# Altium PCB PCB_KB77_2021-07-05.pcbdoc
Units mm, origin at the board's own origin, x right, y up, seen from the top; angles counter-clockwise.
Board outline 311.4 x 140.15 mm, 2 copper layers (Top Layer, Bottom Layer); 81 components, 494 nets, 1036 pads, 127 vias.
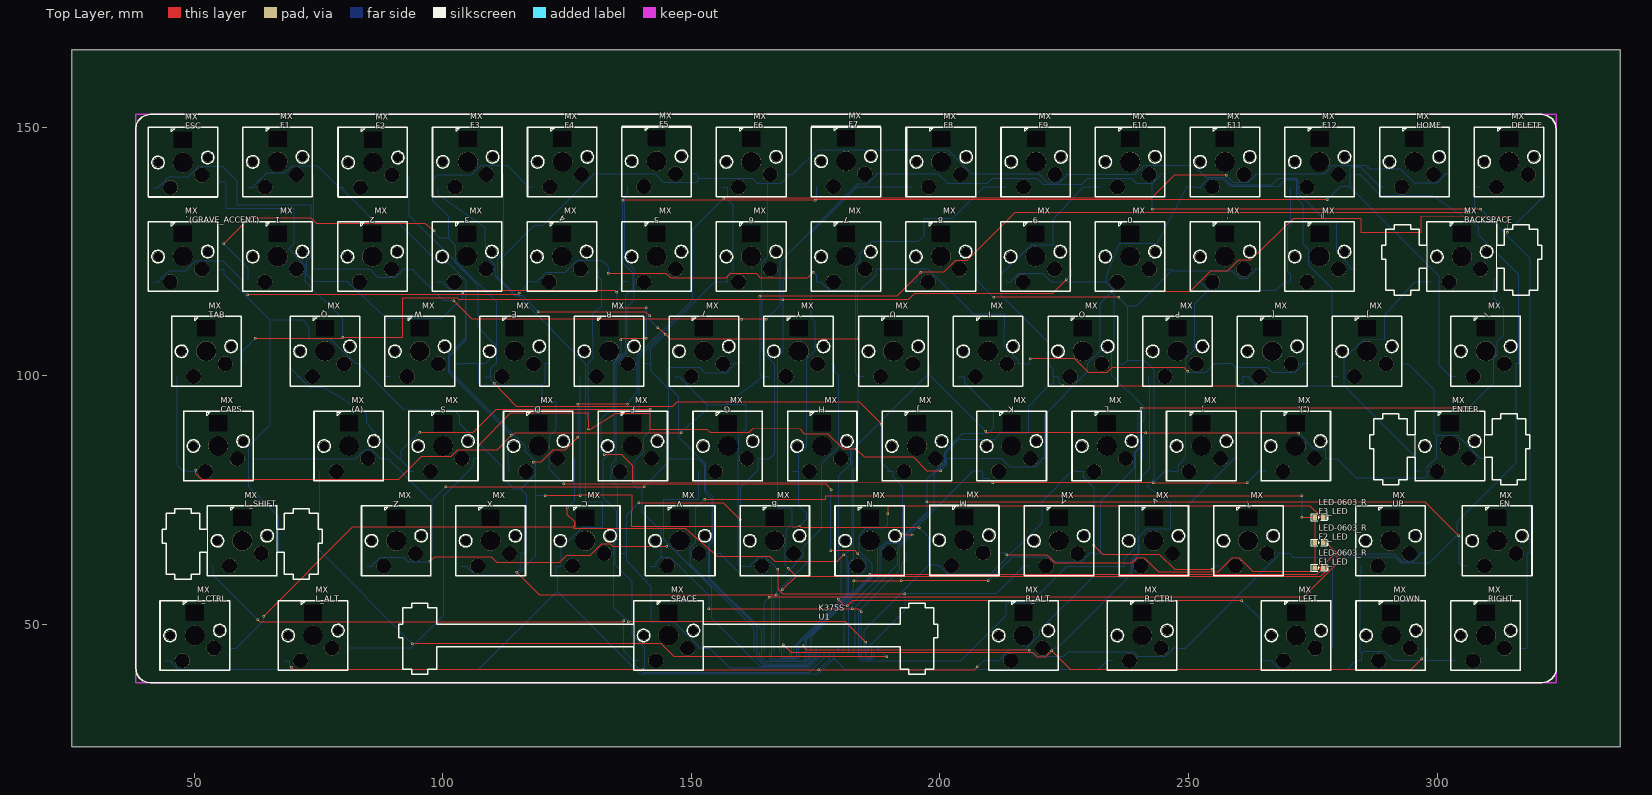
[diagram p0: Top Layer view]
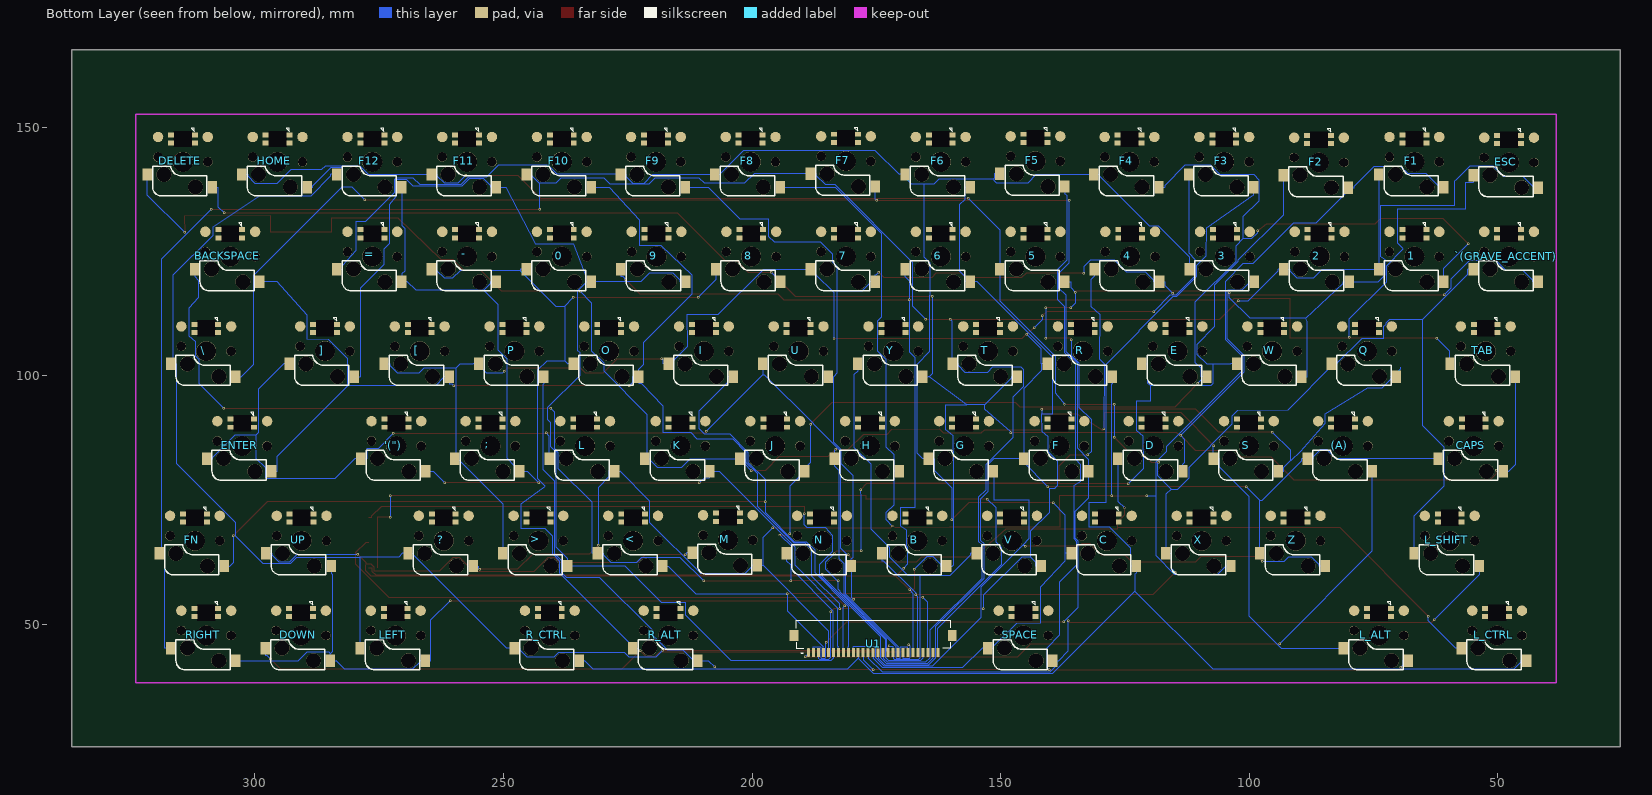
[diagram p1: Bottom Layer view, seen from below]

## Layer stack, top to bottom
Top Layer: signal copper (thickness not stored)
Dielectric: dielectric 0.32, FR-4, Dk 4.8
Bottom Layer: signal copper (thickness not stored)

## Board outline
336.805,25.4 25.4,25.4 25.4,165.545 336.805,165.545

## Components (designator, comment, footprint, x,y, rotation, side; value= is the part's Value field where it differs from the comment)
0 "MX" MX_CONTACT_POGOPIN_M1.4 238.252,123.953 r0 top
1 "MX" MX_CONTACT_POGOPIN_M1.4 66.802,123.953 r0 top
2 "MX" MX_CONTACT_POGOPIN_M1.4 85.852,123.953 r0 top
3 "MX" MX_CONTACT_POGOPIN_M1.4 104.902,123.953 r0 top
4 "MX" MX_CONTACT_POGOPIN_M1.4 123.952,123.953 r0 top
5 "MX" MX_CONTACT_POGOPIN_M1.4 143.002,123.953 r0 top
6 "MX" MX_CONTACT_POGOPIN_M1.4 162.052,123.953 r0 top
7 "MX" MX_CONTACT_POGOPIN_M1.4 181.102,123.953 r0 top
8 "MX" MX_CONTACT_POGOPIN_M1.4 200.152,123.953 r0 top
9 "MX" MX_CONTACT_POGOPIN_M1.4 219.202,123.953 r0 top
"'(\")" "MX" MX_CONTACT_POGOPIN_M1.4 271.526,85.853 r0 top
(A) "MX" MX_CONTACT_POGOPIN_M1.4 81.153,85.853 r0 top
- "MX" MX_CONTACT_POGOPIN_M1.4 257.302,123.953 r0 top
; "MX" MX_CONTACT_POGOPIN_M1.4 252.603,85.853 r0 top
< "MX" MX_CONTACT_POGOPIN_M1.4 223.901,66.803 r0 top
= "MX" MX_CONTACT_POGOPIN_M1.4 276.352,123.953 r0 top
> "MX" MX_CONTACT_POGOPIN_M1.4 242.951,66.803 r0 top
? "MX" MX_CONTACT_POGOPIN_M1.4 262.001,66.803 r0 top
[ "MX" MX_CONTACT_POGOPIN_M1.4 266.827,104.903 r0 top
\ "MX" MX_CONTACT_POGOPIN_M1.4 309.753,104.903 r0 top
] "MX" MX_CONTACT_POGOPIN_M1.4 285.877,104.903 r0 top
`(GRAVE_ACCENT) "MX" MX_CONTACT_POGOPIN_M1.4 47.752,123.953 r0 top
B "MX" MX_CONTACT_POGOPIN_M1.4 166.751,66.803 r0 top
BACKSPACE "MX" MX_CONTACT_POGOPIN_M1.4 304.927,123.953 r0 top
C "MX" MX_CONTACT_POGOPIN_M1.4 128.651,66.803 r0 top
CAPS "MX" MX_CONTACT_POGOPIN_M1.4 54.864,85.853 r0 top
D "MX" MX_CONTACT_POGOPIN_M1.4 119.253,85.853 r0 top
DELETE "MX" MX_CONTACT_POGOPIN_M1.4 314.452,143.003 r0 top
DOWN "MX" MX_CONTACT_POGOPIN_M1.4 290.703,47.753 r0 top
E "MX" MX_CONTACT_POGOPIN_M1.4 114.427,104.903 r0 top
ENTER "MX" MX_CONTACT_POGOPIN_M1.4 302.514,85.853 r0 top
ESC "MX" MX_CONTACT_POGOPIN_M1.4 47.752,142.876 r0 top
F "MX" MX_CONTACT_POGOPIN_M1.4 138.176,85.853 r0 top
F1 "MX" MX_CONTACT_POGOPIN_M1.4 66.802,143.003 r0 top
F1_LED "LED-0603_R" LED0603_RED 276.225,61.342 r0 top
F2 "MX" MX_CONTACT_POGOPIN_M1.4 85.979,142.876 r0 top
F2_LED "LED-0603_R" LED0603_RED 276.225,66.422 r0 top
F3 "MX" MX_CONTACT_POGOPIN_M1.4 105.029,143.003 r0 top
F3_LED "LED-0603_R" LED0603_RED 276.225,71.502 r0 top
F4 "MX" MX_CONTACT_POGOPIN_M1.4 124.079,143.003 r0 top
F5 "MX" MX_CONTACT_POGOPIN_M1.4 143.002,143.13 r0 top
F6 "MX" MX_CONTACT_POGOPIN_M1.4 162.052,143.003 r0 top
F7 "MX" MX_CONTACT_POGOPIN_M1.4 181.102,143.13 r0 top
F8 "MX" MX_CONTACT_POGOPIN_M1.4 200.279,143.003 r0 top
F9 "MX" MX_CONTACT_POGOPIN_M1.4 219.329,143.003 r0 top
F10 "MX" MX_CONTACT_POGOPIN_M1.4 238.252,143.003 r0 top
F11 "MX" MX_CONTACT_POGOPIN_M1.4 257.302,143.003 r0 top
F12 "MX" MX_CONTACT_POGOPIN_M1.4 276.352,143.003 r0 top
FN "MX" MX_CONTACT_POGOPIN_M1.4 312.039,66.803 r0 top
G "MX" MX_CONTACT_POGOPIN_M1.4 157.353,85.853 r0 top
H "MX" MX_CONTACT_POGOPIN_M1.4 176.276,85.853 r0 top
HOME "MX" MX_CONTACT_POGOPIN_M1.4 295.402,143.003 r0 top
I "MX" MX_CONTACT_POGOPIN_M1.4 209.677,104.903 r0 top
J "MX" MX_CONTACT_POGOPIN_M1.4 195.326,85.853 r0 top
K "MX" MX_CONTACT_POGOPIN_M1.4 214.376,85.853 r0 top
L "MX" MX_CONTACT_POGOPIN_M1.4 233.553,85.853 r0 top
L_ALT "MX" MX_CONTACT_POGOPIN_M1.4 73.914,47.753 r0 top
L_CTRL "MX" MX_CONTACT_POGOPIN_M1.4 50.165,47.753 r0 top
L_SHIFT "MX" MX_CONTACT_POGOPIN_M1.4 59.69,66.803 r0 top
LEFT "MX" MX_CONTACT_POGOPIN_M1.4 271.653,47.753 r0 top
M "MX" MX_CONTACT_POGOPIN_M1.4 204.851,66.93 r0 top
N "MX" MX_CONTACT_POGOPIN_M1.4 185.928,66.803 r0 top
O "MX" MX_CONTACT_POGOPIN_M1.4 228.727,104.903 r0 top
P "MX" MX_CONTACT_POGOPIN_M1.4 247.777,104.903 r0 top
Q "MX" MX_CONTACT_POGOPIN_M1.4 76.327,104.903 r0 top
R "MX" MX_CONTACT_POGOPIN_M1.4 133.477,104.903 r0 top
R_ALT "MX" MX_CONTACT_POGOPIN_M1.4 216.789,47.753 r0 top
R_CTRL "MX" MX_CONTACT_POGOPIN_M1.4 240.665,47.753 r0 top
RIGHT "MX" MX_CONTACT_POGOPIN_M1.4 309.753,47.753 r0 top
S "MX" MX_CONTACT_POGOPIN_M1.4 100.076,85.853 r0 top
SPACE "MX" MX_CONTACT_POGOPIN_M1.4 145.415,47.753 r0 top
T "MX" MX_CONTACT_POGOPIN_M1.4 152.527,104.903 r0 top
TAB "MX" MX_CONTACT_POGOPIN_M1.4 52.451,104.903 r0 top
U "MX" MX_CONTACT_POGOPIN_M1.4 190.627,104.903 r0 top
U1 "K375S" "K375S  27P" 175.641,48.896 r0 top
UP "MX" MX_CONTACT_POGOPIN_M1.4 290.576,66.803 r0 top
V "MX" MX_CONTACT_POGOPIN_M1.4 147.701,66.803 r0 top
W "MX" MX_CONTACT_POGOPIN_M1.4 95.377,104.903 r0 top
X "MX" MX_CONTACT_POGOPIN_M1.4 109.601,66.803 r0 top
Y "MX" MX_CONTACT_POGOPIN_M1.4 171.577,104.903 r0 top
Z "MX" MX_CONTACT_POGOPIN_M1.4 90.678,66.803 r0 top

## Footprints (in the part's own frame and the unit in brackets; to place one, negate y for a bottom-side part, rotate by r counter-clockwise, add the part's x,y. Pads: shape width x height; smd on the part's side, far side on the other; paste and mask are expansions set on the pad)
"K375S  27P" [mm]
  oval 0.6x1.88 smd far side: 1(13,-4.55)
  rect 0.6x1.88 smd far side: 2(12,-4.55) 3(11,-4.55) 4(10,-4.55) 5(9,-4.55) 6(8,-4.55) 7(7,-4.55) 8(6,-4.55) 9(5,-4.55) 10(4,-4.55) 11(3,-4.55) 12(2,-4.55) 13(1,-4.55) 14(0,-4.55) 15(-1,-4.55) 16(-2,-4.55) 17(-3,-4.55) 18(-4,-4.55) 19(-5,-4.55) 20(-6,-4.55) 21(-7,-4.55) 22(-8,-4.55) 23(-9,-4.55) 24(-10,-4.55) 25(-11,-4.55) 26(-12,-4.55) 27(-13,-4.55)
  rect 1.8x2.2 smd far side: 98(15.908,-1.11) 99(-15.908,-1.11)
LED0603_RED [mm]
  rect 0.9x1 smd: 1(-0.85,0) 2(0.85,0)
  silkscreen extent -1.54,-0.73 1.75,0.73
MX_CONTACT_POGOPIN_M1.4 [mm]
  rect 1.9x2.5 smd far side: K1(-5.918,-5.08) K2(7.188,-2.54)
  rect 1.2x1 smd far side: L1(-2.4,5.425) L2(-2.4,3.775) L3(2.4,3.775) L4(2.4,5.425)
  round 2.1 smd far side: P1(-5,5) P2(5,5)
  round 1.9 hole 1.9 unplated: ""(-5,0) ""(5,1)
  round 3 hole 3 unplated: ""(-2.54,-5.08) ""(3.81,-2.54)
  round 4 hole 4 unplated: ""(0,0)
  Multi-Layer board cut-out: -1.8,6.2 1.8,6.2 1.8,3 -1.8,3
  silkscreen extent -7,-7 7,7

## Via types
v1: diameter 0.5, hole 0.3, Top Layer to Bottom Layer, 127 vias

## Nets (pads, with @x,y where several pads share a name; then routed paths per layer and width w, separated by ;. In a path a pad name is that pad's centre, name@x,y a point inside that pad or via, vN(x,y) a via of type N, cw(c..) or ccw(c..) an arc to the next point about the centre after c; other vN are vias at no path point)
0_K2: 0.K2 8.K2 -.K2 DOWN.K2 O.K2 R_ALT.K2 U1.20 | length 300.1
  Top Layer w0.15: v1(168.529,45.923) 170.083,44.369 218.654,44.369 219.574,43.449 221.238,43.449 v1(222.486,44.696) 226.197,40.985 294.77,40.985 v1(296.906,43.12) ; v1(210.857,115.74) v1(235.934,115.74)
  Bottom Layer w0.15: v1(168.529,45.923) 168.154,45.548 168.154,43.328 168.264,43.219 169.641,43.219 U1.20 ; 8.K2 207.341,119.256 v1(210.857,115.74) ; v1(222.486,44.696) 222.84,45.051 222.84,45.213 223.607,45.213 R_ALT.K2 ; R_ALT.K2@223.607,45.213 238.618,60.222 238.618,62.68 240.099,64.161 240.099,67.75 241.549,69.201 246.38,69.216 246.38,74.296 241.549,77.755 243.05,79.256 243.05,101.167 241.219,102.998 237.689,102.998 ; O.K2 237.053,102.363 237.688,102.998 237.688,113.986 ; v1(235.934,115.74) 237.688,113.986 ; 0.K2 246.578,121.413 246.578,121.127 ; -.K2 263.353,121.413 263.353,121.129 261.785,119.56 260.271,119.56 258.705,121.127 246.578,121.127 ; v1(296.906,43.12) 297.561,43.776 297.892,43.776 DOWN.K2 ; 237.688,113.986 239.437,113.986 246.578,121.127
0_L1: 0.L1
0_L2: 0.L2
0_L3: 0.L3
0_L4: 0.L4
0_P1: 0.P1
0_P2: 0.P2
1_L1: 1.L1
1_L2: 1.L2
1_L3: 1.L3
1_L4: 1.L4
1_P1: 1.P1
1_P2: 1.P2
2_L1: 2.L1
2_L2: 2.L2
2_L3: 2.L3
2_L4: 2.L4
2_P1: 2.P1
2_P2: 2.P2
3_L1: 3.L1
3_L2: 3.L2
3_L3: 3.L3
3_L4: 3.L4
3_P1: 3.P1
3_P2: 3.P2
4_L1: 4.L1
4_L2: 4.L2
4_L3: 4.L3
4_L4: 4.L4
4_P1: 4.P1
4_P2: 4.P2
5_L1: 5.L1
5_L2: 5.L2
5_L3: 5.L3
5_L4: 5.L4
5_P1: 5.P1
5_P2: 5.P2
6_K2: 6.K2 9.K2 ESC.K2 M.K2 TAB.K2 U1.22 UP.K2 | length 520.9
  Top Layer w0.15: v1(62.279,107.52) 79.707,107.52 v1(79.883,107.697) ; v1@79.883,107.598 91.821,107.605 91.821,107.824 91.821,108.002 91.821,115.571 102.997,115.571 103.282,115.286 v1@168.39,115.286 ; v1(168.303,56.908) 171.11,59.714 ; v1(168.39,115.287) 193.621,115.287 194.834,116.501 222.539,116.501 v1(225.362,119.323) ; v1(169.53,61.294) 171.11,59.714 ; v1(213.434,63.952) 221.519,63.952 223.067,62.404 238.706,62.404 239.713,63.41 241.111,63.41 243.928,60.593 255.945,60.593 258.763,63.41 260.161,63.41 262.92,60.651 275.978,60.651 276.022,60.695 276.022,61.503 276.548,62.029 277.603,62.029 ; v1(279.322,64.109) 277.603,62.39 277.603,62.029 ; 171.11,59.714 171.16,59.665 276.613,59.665 277.713,60.764 277.713,61.92 277.603,62.029
  Bottom Layer w0.15: ESC.K2 54.941,138.899 56.449,138.898 56.515,133.605 70.104,133.605 70.104,126.62 69.088,125.477 72.406,122.109 72.406,118.883 79.883,111.405 v1(79.883,107.697) ; TAB.K2 59.64,104.881 v1(62.279,107.52) ; U1.22 167.641,56.246 v1(168.303,56.908) ; v1@168.39,115.286 168.39,104.806 167.265,103.681 167.265,73.45 170.18,73.407 170.18,69.851 168.961,68.985 168.961,65.774 168.791,65.604 168.791,62.033 v1@169.53,61.294 ; v1(168.39,115.287) 168.39,119.125 169.241,119.976 6.K2 ; M.K2 213.177,64.39 213.177,64.209 v1(213.434,63.952) ; v1(225.362,119.323) 226.014,119.976 226.391,119.976 9.K2 ; v1(279.322,64.109) 291.419,64.109 292.961,62.566 295.214,62.566 296.627,63.979 296.627,64.263 UP.K2
6_L1: 6.L1
6_L2: 6.L2
6_L3: 6.L3
6_L4: 6.L4
6_P1: 6.P1
6_P2: 6.P2
7_L1: 7.L1
7_L2: 7.L2
7_L3: 7.L3
7_L4: 7.L4
7_P1: 7.P1
7_P2: 7.P2
8_L1: 8.L1
8_L2: 8.L2
8_L3: 8.L3
8_L4: 8.L4
8_P1: 8.P1
8_P2: 8.P2
9_L1: 9.L1
9_L2: 9.L2
9_L3: 9.L3
9_L4: 9.L4
9_P1: 9.P1
9_P2: 9.P2
"'(\")_L1": "'(\").L1"
"'(\")_L2": "'(\").L2"
"'(\")_L3": "'(\").L3"
"'(\")_L4": "'(\").L4"
"'(\")_P1": "'(\").P1"
"'(\")_P2": "'(\").P2"
(A)_K1: (A).K1 U1.1 | length 140
  Top Layer w0.15: v1(93.865,46.132) 143.943,46.132 146.574,43.5 v1(189.304,43.5)
  Bottom Layer w0.15: 75.235,80.773 75.235,64.761 v1(93.865,46.132) ; U1.1 188.641,44.163 v1(189.304,43.5)
(A)_L1: (A).L1
(A)_L2: (A).L2
(A)_L3: (A).L3
(A)_L4: (A).L4
(A)_P1: (A).P1
(A)_P2: (A).P2
-_L1: -.L1
-_L2: -.L2
-_L3: -.L3
-_L4: -.L4
-_P1: -.P1
-_P2: -.P2
;_L1: ;.L1
;_L2: ;.L2
;_L3: ;.L3
;_L4: ;.L4
;_P1: ;.P1
;_P2: ;.P2
<_L1: <.L1
<_L2: <.L2
<_L3: <.L3
<_L4: <.L4
<_P1: <.P1
<_P2: <.P2
=_K1: 2.K1 5.K1 "'(\").K1" -.K1 ;.K1 =.K1 ESC.K1 F12.K1 K.K1 U1.7 W.K1 | length 459.9
  Top Layer w0.15: v1(104.04,116.711) 104.392,117.063 134.789,117.063 v1(135.025,116.827) ; v1(132.461,84.075) 136.017,84.075 138.176,81.916 138.176,78.614 210.528,78.512 v1(210.572,78.456) ; v1(135.817,107.199) 135.817,107.369 136.017,107.57 v1(140.97,107.57) ; v1(135.89,113.666) v1(140.97,113.666) ; v1(210.572,78.456) v1(242.867,78.456) v1(261.768,78.456)
  Bottom Layer w0.15: ESC.K1 42.688,137.796 44.885,139.993 48.801,139.993 50.938,142.129 55.708,142.129 58.611,139.226 ; 58.674,139.193 58.674,134.24 73.533,134.24 73.533,123.953 72.644,123.318 72.67,122.218 72.67,120.255 74.052,118.873 81.071,118.873 81.071,118.589 88.646,111.507 ; W.K1 88.322,99.823 88.322,110.976 88.646,111.507 ; v1(104.04,116.711) 104.013,115.698 99.822,111.507 88.646,111.507 ; v1(132.461,84.075) 131.832,84.705 131.832,91.271 134.255,93.694 134.255,102.586 135.817,104.148 v1(135.817,107.199) ; v1(135.89,113.666) 135.025,114.532 v1(135.025,116.827) 135.947,117.75 135.947,118.873 5.K1 ; v1(140.97,107.57) v1(140.97,113.666) ; U1.7 182.641,45.473 182.822,45.654 182.822,53.366 191.454,61.998 191.454,65.606 206.622,80.773 K.K1 208.458,79.579 208.661,79.376 209.652,79.376 v1(210.572,78.456) ; v1(242.867,78.456) 245.185,80.773 245.548,80.773 246.685,80.773 247.822,80.773 247.822,81.91 249.371,83.459 249.371,103.403 251.159,105.191 251.159,114.34 253.965,117.145 252.521,118.589 252.521,118.873 -.K1 ; 253.965,117.146 267.569,117.146 269.296,118.873 =.K1 270.434,120.473 269.875,121.032 269.875,129.668 270.434,130.227 F12.K1 ; v1(261.768,78.456) 264.085,80.773 265.608,80.773
=_L1: =.L1
=_L2: =.L2
=_L3: =.L3
=_L4: =.L4
=_P1: =.P1
=_P2: =.P2
>_L1: >.L1
>_L2: >.L2
>_L3: >.L3
>_L4: >.L4
>_P1: >.P1
>_P2: >.P2
?_L1: ?.L1
?_L2: ?.L2
?_L3: ?.L3
?_L4: ?.L4
?_P1: ?.P1
?_P2: ?.P2
[_L1: [.L1
[_L2: [.L2
[_L3: [.L3
[_L4: [.L4
[_P1: [.P1
[_P2: [.P2
\_L1: \.L1
\_L2: \.L2
\_L3: \.L3
\_L4: \.L4
\_P1: \.P1
\_P2: \.P2
]_L1: ].L1
]_L2: ].L2
]_L3: ].L3
]_L4: ].L4
]_P1: ].P1
]_P2: ].P2
`(GRAVE_ACCENT)_K1: 4.K1 7.K1 `(GRAVE_ACCENT).K1 DOWN.K1 F9.K1 LEFT.K1 N.K1 RIGHT.K1 U1.8 U.K1 UP.K1 | length 433
  Top Layer w0.15: v1(60.822,116.25) 115.021,116.25 v1(115.397,116.626) ; v1(133.312,120.64) 144.836,120.64 145.818,119.658 157.052,119.658 157.962,120.568 163.038,120.568 163.88,119.726 173.386,119.726 v1(174.498,120.838) ; v1(179.584,55.054) 180.878,53.76 181.36,53.76 v1(181.36,53.735) ; v1@181.359,53.76 182.337,54.738 v1(260.731,54.738)
  Bottom Layer w0.15: 41.834,118.873 42.971,118.873 42.971,119.157 44.885,121.07 48.316,121.07 50.371,123.125 55.797,123.125 59.48,119.443 59.48,117.592 v1(60.822,116.25) ; v1(115.397,116.626) 116.897,118.126 116.897,118.873 4.K1 119.171,118.873 119.171,119.157 120.791,120.777 124.692,120.777 127.079,123.165 132.009,123.165 133.312,121.862 v1(133.312,120.64) ; v1(174.498,120.838) 175.026,120.31 175.184,120.31 7.K1 176.321,118.873 176.321,118.616 177.847,117.09 182.949,117.09 ; v1(179.584,55.054) 180.01,55.48 N.K1 180.01,62.441 180.01,63.16 179.636,63.535 179.636,79.856 182.022,82.242 182.022,85.113 183.572,86.663 183.572,99.823 ; v1(181.36,53.735) 181.641,53.453 U1.8 ; U.K1 183.572,99.823 ; F9.K1 208.847,137.923 202.449,131.525 196.723,131.525 196.723,128.085 195.558,126.92 186.289,126.92 183.907,124.537 183.907,122.947 182.949,121.989 182.949,117.09 ; v1(260.731,54.738) 264.598,50.871 264.598,42.673 LEFT.K1 266.304,42.673 266.872,42.673 266.872,42.389 268.329,40.932 281.907,40.932 283.648,42.673 DOWN.K1 284.785,44.11 ; UP.K1 284.658,60.286 284.393,60.021 284.393,44.502 284.785,44.11 ; RIGHT.K1 291.255,42.673 289.492,44.436 285.111,44.436 284.785,44.11 ; 182.949,117.09 182.949,100.446 183.572,99.823
`(GRAVE_ACCENT)_L1: `(GRAVE_ACCENT).L1
`(GRAVE_ACCENT)_L2: `(GRAVE_ACCENT).L2
`(GRAVE_ACCENT)_L3: `(GRAVE_ACCENT).L3
`(GRAVE_ACCENT)_L4: `(GRAVE_ACCENT).L4
`(GRAVE_ACCENT)_P1: `(GRAVE_ACCENT).P1
`(GRAVE_ACCENT)_P2: `(GRAVE_ACCENT).P2
B_K1: 3.K1 8.K1 <.K1 B.K1 CAPS.K1 D.K1 DELETE.K1 T.K1 TAB.K1 U1.4 Y.K1 | length 501.2
  Top Layer w0.15: v1(50.36,80.955) 50.36,80.241 51.551,79.05 91.056,79.05 95.663,83.658 101.573,83.658 102.916,85.001 110.847,85.001 v1(113.819,87.973) 114.008,87.973 114.554,88.52 v1(147.955,88.52) ; v1(163.784,115.95) 191.311,115.95 v1(196.136,120.775) 200.715,120.775 203.041,123.101 205.397,123.101 215.088,132.792 v1(306.18,132.792) ; v1(167.384,61.077) 167.384,57.131 168.333,56.183 v1(192.904,56.183)
  Bottom Layer w0.15: TAB.K1 46.533,82.049 47.809,80.773 CAPS.K1 50.083,80.773 50.266,80.955 v1(50.36,80.955) ; 3.K1 100.121,118.873 100.121,118.589 101.543,117.167 104.343,117.167 104.496,117.014 104.496,107.518 101.135,104.158 101.135,100.657 v1(113.819,87.973) 113.044,87.198 113.044,82.501 113.335,82.21 D.K1 ; T.K1 147.746,99.823 147.746,99.539 153.162,94.108 ; v1(147.955,88.52) 147.955,88.75 153.162,93.219 153.162,94.108 ; v1(163.784,115.95) 163.784,100.413 164.374,99.823 ; Y.K1 164.522,99.823 164.374,99.823 ; v1(167.384,61.077) 164.887,63.574 163.537,63.574 161.97,62.007 161.97,61.723 B.K1 160.265,61.723 159.696,61.723 159.391,62.028 159.391,84.797 159.558,84.964 159.558,87.871 161.036,89.155 161.036,94.108 156.845,94.108 ; U1.4 185.641,45.473 192.904,52.735 v1(192.904,56.183) 211.306,56.183 216.846,61.723 <.K1 ; 8.K1 195.371,118.873 195.371,120.01 v1(196.136,120.775) ; v1(306.18,132.792) 307.396,134.01 307.396,137.923 DELETE.K1 ; 153.162,94.108 156.845,94.108 ; 156.845,94.108 164.374,99.823
B_L1: B.L1
B_L2: B.L2
B_L3: B.L3
B_L4: B.L4
B_P1: B.P1
B_P2: B.P2
BACKSPACE_L1: BACKSPACE.L1
BACKSPACE_L2: BACKSPACE.L2
BACKSPACE_L3: BACKSPACE.L3
BACKSPACE_L4: BACKSPACE.L4
BACKSPACE_P1: BACKSPACE.P1
BACKSPACE_P2: BACKSPACE.P2
C_L1: C.L1
C_L2: C.L2
C_L3: C.L3
C_L4: C.L4
C_P1: C.P1
C_P2: C.P2
CAPS_L1: CAPS.L1
CAPS_L2: CAPS.L2
CAPS_L3: CAPS.L3
CAPS_L4: CAPS.L4
CAPS_P1: CAPS.P1
CAPS_P2: CAPS.P2
D_L1: D.L1
D_L2: D.L2
D_L3: D.L3
D_L4: D.L4
D_P1: D.P1
D_P2: D.P2
DELETE_L1: DELETE.L1
DELETE_L2: DELETE.L2
DELETE_L3: DELETE.L3
DELETE_L4: DELETE.L4
DELETE_P1: DELETE.P1
DELETE_P2: DELETE.P2
DOWN_L1: DOWN.L1
DOWN_L2: DOWN.L2
DOWN_L3: DOWN.L3
DOWN_L4: DOWN.L4
DOWN_P1: DOWN.P1
DOWN_P2: DOWN.P2
E_L1: E.L1
E_L2: E.L2
E_L3: E.L3
E_L4: E.L4
E_P1: E.P1
E_P2: E.P2
ENTER_L1: ENTER.L1
ENTER_L2: ENTER.L2
ENTER_L3: ENTER.L3
ENTER_L4: ENTER.L4
ENTER_P1: ENTER.P1
ENTER_P2: ENTER.P2
ESC_L1: ESC.L1
ESC_L2: ESC.L2
ESC_L3: ESC.L3
ESC_L4: ESC.L4
ESC_P1: ESC.P1
ESC_P2: ESC.P2
F1_K2: 1.K2 2.K2 F1.K2 F7.K2 F10.K2 FN.K2 RIGHT.K2 T.K2 U1.16 | length 485.8
  Top Layer w0.15: v1(102.208,115.077) 105.955,111.33 v1(160.095,111.33) v1(165.062,111.33) ; v1(242.646,133.463) v1(308.768,133.463)
  Bottom Layer w0.15: F1.K2 1.K2 85.299,121.413 87.018,119.694 90.469,119.694 91.903,121.129 91.903,121.413 2.K2 94.178,121.413 94.178,121.129 100.23,115.077 v1(102.208,115.077) ; v1(160.095,111.33) 159.716,110.951 T.K2 158.578,102.363 158.578,102.079 157.103,100.603 152.746,100.603 151.675,101.674 145.902,101.674 145.395,101.168 145.395,97.866 147.483,95.779 147.483,87.598 152.931,82.15 152.931,77.072 154.358,75.646 154.358,66.624 153.738,66.005 153.738,59.273 164.154,48.857 164.154,43.32 165.045,42.429 172.851,42.429 173.641,43.219 U1.16 ; v1(165.062,111.33) 167.768,114.035 167.768,122.836 183.383,138.451 185.299,138.451 187.153,140.306 187.153,140.59 F7.K2 189.428,140.59 199.599,140.59 201.515,138.674 209.546,138.674 210.568,139.696 219.543,139.696 220.755,138.483 228.544,138.483 229.757,139.696 238.466,139.696 239.46,138.702 242.646,138.702 ; v1(242.646,133.463) 242.646,138.702 ; F10.K2 244.303,140.463 244.303,140.179 242.827,138.702 242.646,138.702 ; v1(308.768,133.463) 318.687,123.543 FN.K2@318.687,64.263 ; RIGHT.K2 318.08,45.213 318.08,64.243 318.1,64.263 FN.K2@318.687,64.263 ; FN.K2 FN.K2@318.687,64.263
F1_L1: F1.L1
F1_L2: F1.L2
F1_L3: F1.L3
F1_L4: F1.L4
F1_P1: F1.P1
F1_P2: F1.P2
F2_L1: F2.L1
F2_L2: F2.L2
F2_L3: F2.L3
F2_L4: F2.L4
F2_P1: F2.P1
F2_P2: F2.P2
F3_L1: F3.L1
F3_L2: F3.L2
F3_L3: F3.L3
F3_L4: F3.L4
F3_P1: F3.P1
F3_P2: F3.P2
F4_K2: 3.K2 =.K2 C.K2 F4.K2 F5.K2 F6.K2 F8.K2 F9.K2 G.K2 SPACE.K2 U1.14 | length 371
  Top Layer w0.15: v1(139.446,74.423) 156.419,74.423 v1(159.852,70.989)
  Bottom Layer w0.15: 3.K2 112.091,123.956 118.336,130.202 120.153,130.202 130.13,140.179 130.13,140.463 F4.K2 142.831,140.463 144.492,138.801 150.871,138.801 151.365,139.295 151.365,139.619 ; C.K2 136.977,64.263 ; v1(139.446,74.423) 136.977,71.953 136.977,64.263 ; F5.K2 151.328,140.59 151.328,139.657 151.365,139.619 ; 151.466,45.213 151.466,45.553 146.772,50.25 141.986,50.293 141.986,57.532 136.978,62.79 136.978,64.263 ; 151.466,45.213 152.035,45.213 SPACE.K2 153.741,45.213 157.675,41.279 173.702,41.279 175.641,43.219 U1.14 ; v1(159.852,70.989) 159.852,77.431 163.404,80.983 163.404,83.313 G.K2 165.679,83.313 166.804,84.438 166.804,102.336 164.221,104.919 164.221,116.131 164.157,116.195 164.157,122.611 165.345,123.799 165.345,138.609 ; F6.K2 F6.K2@169.809,140.463 ; 282.403,121.413 282.403,122.127 279.654,125.096 279.654,130.938 277.749,130.938 271.905,136.785 271.905,139.437 271.592,139.749 268.125,139.749 266.754,138.375 258.57,138.375 257.02,139.927 253.439,139.927 251.082,142.284 240.978,142.284 239.159,140.463 F9.K2 225.949,140.463 225.38,140.463 225.38,140.107 224.02,138.746 221.715,138.746 219.998,140.463 F8.K2 206.33,140.463 206.33,140.752 201.701,145.382 175.297,145.382 170.378,140.463 F6.K2@169.809,140.463 ; 282.403,121.413 =.K2 ; 151.365,139.619 162.343,139.619 163.352,138.609 165.345,138.609 ; 165.345,138.609 167.956,138.609 F6.K2@169.809,140.463
F4_L1: F4.L1
F4_L2: F4.L2
F4_L3: F4.L3
F4_L4: F4.L4
F4_P1: F4.P1
F4_P2: F4.P2
F5_L1: F5.L1
F5_L2: F5.L2
F5_L3: F5.L3
F5_L4: F5.L4
F5_P1: F5.P1
F5_P2: F5.P2
F6_L1: F6.L1
F6_L2: F6.L2
F6_L3: F6.L3
F6_L4: F6.L4
F6_P1: F6.P1
F6_P2: F6.P2
F7_L1: F7.L1
F7_L2: F7.L2
F7_L3: F7.L3
F7_L4: F7.L4
F7_P1: F7.P1
F7_P2: F7.P2
F8_L1: F8.L1
F8_L2: F8.L2
F8_L3: F8.L3
F8_L4: F8.L4
F8_P1: F8.P1
F8_P2: F8.P2
F9_L1: F9.L1
F9_L2: F9.L2
F9_L3: F9.L3
F9_L4: F9.L4
F9_P1: F9.P1
F9_P2: F9.P2
F10_L1: F10.L1
F10_L2: F10.L2
F10_L3: F10.L3
F10_L4: F10.L4
F10_P1: F10.P1
F10_P2: F10.P2
F11_K1: 0.K1 1.K1 9.K1 >.K1 ].K1 E.K1 F4.K1 F11.K1 J.K1 U1.6 | length 512.1
  Top Layer w0.15: v1(56.007,126.493) 61.087,131.7 73.533,131.7 74.676,130.557 96.52,130.557 v1@98.339,129.107 ; v1(110.351,98.483) 114.935,93.727 130.937,93.727 146.177,93.727 147.066,94.616 183.896,94.616 188.172,90.34 v1(188.172,90.274) ; v1(192.454,68.227) 192.721,67.96 v1(194.454,67.96)
  Bottom Layer w0.15: v1(56.007,126.493) 60.884,121.616 1.K1 ; v1(98.338,129.108) 98.338,128.767 99.513,127.592 101.166,127.592 ; E.K1 109.646,99.823 ; v1(110.351,98.483) 109.646,99.188 109.646,99.823 ; F4.K1 117.024,137.923 117.024,138.207 112.948,142.283 107.756,142.283 105.881,140.408 99.043,140.408 97.974,139.338 97.974,135.213 101.166,132.021 101.166,127.592 ; 183.641,43.219 183.641,43.782 U1.6 183.641,52.671 191.911,60.941 191.911,65.582 194.29,67.96 v1(194.454,67.96) ; 183.642,43.219 184.168,42.693 204.168,42.693 213.36,51.817 213.36,54.357 218.186,54.357 225.484,61.723 >.K1 237.033,63.16 239.374,65.501 239.374,84.595 240.478,85.7 240.478,90.547 241.046,91.114 241.046,93.655 234.595,100.106 234.595,104.582 235.065,105.052 235.065,117.044 233.236,118.873 0.K1@233.047,118.873 ; v1(188.172,90.274) 188.172,82.578 J.K1@189.977,80.773 ; J.K1 J.K1@189.977,80.773 ; v1(192.454,68.227) 192.454,77.727 190.545,79.636 190.545,80.773 J.K1@189.977,80.773 ; 9.K1 214.421,118.873 214.421,119.157 215.829,120.565 220.659,120.565 222.351,118.873 0.K1 232.478,118.873 0.K1@233.047,118.873 ; ].K1 278.822,99.823 278.822,117.553 274.047,122.329 274.047,125.447 272.923,126.493 272.923,134.367 271.608,135.943 271.608,139.353 271.564,139.397 269.428,139.397 268.144,138.113 258.35,138.113 256.844,139.619 253.934,139.619 252.521,138.207 252.521,137.923 F11.K1 249.555,137.923 243.586,126.493 235.966,126.493 233.471,120.01 233.471,118.873 0.K1@233.047,118.873 ; 101.166,127.592 102.643,126.115 102.643,123.007 110.828,114.822 110.828,102.647 109.646,101.465 109.646,99.823
F11_L1: F11.L1
F11_L2: F11.L2
F11_L3: F11.L3
F11_L4: F11.L4
F11_P1: F11.P1
F11_P2: F11.P2
F12_L1: F12.L1
F12_L2: F12.L2
F12_L3: F12.L3
F12_L4: F12.L4
F12_P1: F12.P1
F12_P2: F12.P2
F_L1: F.L1
F_L2: F.L2
F_L3: F.L3
F_L4: F.L4
F_P1: F.P1
F_P2: F.P2
FN_K1: FN.K1 I.K1 U1.9 | length 193.2
  Top Layer w0.15: v1(197.358,74.677) 297.448,74.677 v1(304.343,67.782)
  Bottom Layer w0.15: U1.9 180.641,45.473 180.641,53.635 187.426,60.42 187.426,64.95 189.092,66.616 191.479,66.616 197.358,72.495 v1(197.358,74.677) 197.358,79.149 200.824,82.614 200.824,84.622 204.526,88.325 209.61,88.325 210.742,89.457 210.742,92.84 204.896,98.686 204.896,99.823 I.K1 ; v1(304.343,67.782) 304.343,62.365 304.983,61.723 FN.K1
FN_L1: FN.L1
FN_L2: FN.L2
FN_L3: FN.L3
FN_L4: FN.L4
FN_P1: FN.P1
FN_P2: FN.P2
G_K1: G.K1 U1.10 Z.K1 | length 139
  Top Layer w0.15: v1(97.388,62.645) 98.356,63.613 109.78,63.613 110.885,62.508 123.499,62.508 124.911,63.92 129.701,63.92 131.946,66.166 133.649,66.166 134.149,65.665 v1(145.039,65.665)
  Bottom Layer w0.15: Z.K1 85.897,61.723 85.897,62.007 87.407,63.516 92.123,63.516 93.065,62.575 97.318,62.575 v1(97.388,62.645) ; v1(145.039,65.665) 145.271,65.897 145.514,65.897 ; G.K1 151.435,79.336 151.435,75.035 144.399,75.058 144.399,67.184 145.514,65.896 ; U1.10 179.641,45.473 175.173,45.473 175.129,45.43 175.129,43.254 173.417,41.542 163.711,41.542 153.968,51.285 153.968,57.443 145.514,65.897
G_L1: G.L1
G_L2: G.L2
G_L3: G.L3
G_L4: G.L4
G_P1: G.P1
G_P2: G.P2
H_L1: H.L1
H_L2: H.L2
H_L3: H.L3
H_L4: H.L4
H_P1: H.P1
H_P2: H.P2
HOME_K1: \.K1 F7.K1 F.K1 HOME.K1 U1.2 | length 359.8
  Top Layer w0.15: v1(136.197,135.237) v1(174.936,135.237) 175.121,135.422 v1(277.874,135.422) ; v1(137.287,50.547) 180.932,50.547 v1(185.082,46.397)
  Bottom Layer w0.15: v1(136.197,135.237) 136.197,122.726 138.295,120.628 138.295,117.567 136.859,116.131 136.859,104.819 134.517,102.477 134.517,85.366 132.258,83.108 F.K1 132.258,75.492 134.973,72.777 134.973,67.343 134.363,66.734 134.363,53.471 v1(137.287,50.547) ; v1(174.936,135.237) 175.184,135.485 F7.K1 ; v1(185.082,46.397) 185.142,46.337 185.142,43.341 185.264,43.219 186.11,43.219 186.154,43.263 186.154,45.363 186.264,45.473 187.641,45.473 U1.2 ; v1(277.874,135.422) 280.496,138.044 282.365,138.044 ; HOME.K1 288.347,137.923 288.347,138.207 284.654,141.9 282.511,141.9 282.365,141.755 282.365,138.044 ; \.K1 302.697,99.823 300.33,102.191 300.33,120.079 282.365,138.044
HOME_K2: 5.K2 `(GRAVE_ACCENT).K2 B.K2 F11.K2 HOME.K2 L_SHIFT.K2 Q.K2 U1.23 X.K2 | length 467.5
  Top Layer w0.15: v1(114.863,60.491) 119.395,55.959 v1(167.097,55.959) ; v1(118.164,82.614) 119.756,82.614 122.141,85.002 124.499,85.002 v1(127.127,87.631) ; v1(127.127,94.235) v1(137.16,94.235) ; v1(156.553,135.685) 242.479,135.685 247.144,140.35 v1(257.531,140.35)
  Bottom Layer w0.15: 54.941,121.413 56.078,121.413 56.078,120.372 65.187,111.263 ; L_SHIFT.K2 66.879,71.744 60.908,77.715 60.908,85.708 65.187,89.987 65.187,111.263 ; Q.K2 Q.K2@82.974,102.363 ; v1(114.863,60.491) 115.652,61.281 115.652,64.263 X.K2 116.79,76.119 115.707,77.202 ; v1(118.164,82.614) 118.482,82.296 118.482,79.976 115.707,77.202 ; v1(127.127,87.631) v1(127.127,94.235) ; v1(137.16,94.235) 139.06,96.562 139.043,103.884 150.191,115.035 5.K2 150.191,129.322 v1(156.553,135.685) ; U1.23 166.641,45.407 166.641,55.504 v1(167.097,55.959) 167.097,56.319 173.603,62.826 173.94,62.826 B.K2 ; v1(257.531,140.35) 259.125,138.756 261.899,138.756 263.353,140.21 263.353,140.463 F11.K2 277.132,140.463 278.916,142.246 285.753,142.246 286.534,141.465 292.702,141.465 295.476,138.691 299.967,138.691 301.453,140.179 301.453,140.463 HOME.K2 ; 65.187,111.263 71.809,111.263 72.565,110.507 72.565,110.29 73.025,109.856 73.025,107.443 77.343,107.443 77.726,107.161 82.378,102.509 82.378,102.363 Q.K2@82.974,102.363 ; Q.K2@82.974,102.363 92.195,93.143 102.362,93.092 103.378,91.949 103.411,90.315 112.116,81.61 112.116,79.439 114.353,77.202 115.707,77.202
HOME_L1: HOME.L1
HOME_L2: HOME.L2
HOME_L3: HOME.L3
HOME_L4: HOME.L4
HOME_P1: HOME.P1
HOME_P2: HOME.P2
I_L1: I.L1
I_L2: I.L2
I_L3: I.L3
I_L4: I.L4
I_P1: I.P1
I_P2: I.P2
J_L1: J.L1
J_L2: J.L2
J_L3: J.L3
J_L4: J.L4
J_P1: J.P1
J_P2: J.P2
K_L1: K.L1
K_L2: K.L2
K_L3: K.L3
K_L4: K.L4
K_P1: K.P1
K_P2: K.P2
L_ALT_L1: L_ALT.L1
L_ALT_L2: L_ALT.L2
L_ALT_L3: L_ALT.L3
L_ALT_L4: L_ALT.L4
L_ALT_P1: L_ALT.P1
L_ALT_P2: L_ALT.P2
L_CTRL_L1: L_CTRL.L1
L_CTRL_L2: L_CTRL.L2
L_CTRL_L3: L_CTRL.L3
L_CTRL_L4: L_CTRL.L4
L_CTRL_P1: L_CTRL.P1
L_CTRL_P2: L_CTRL.P2
L_L1: L.L1
L_L2: L.L2
L_L3: L.L3
L_L4: L.L4
L_P1: L.P1
L_P2: L.P2
L_SHIFT_K1: L_SHIFT.K1 SPACE.K1 U1.13 | length 140.4
  Top Layer w0.15: v1(62.758,50.96) 63.297,50.42 136.398,50.42 v1(136.398,50.674)
  Bottom Layer w0.15: L_SHIFT.K1 53.772,59.946 v1(62.758,50.96) ; v1(136.398,50.674) 136.398,44.635 138.36,42.673 SPACE.K1@138.681,42.673 ; SPACE.K1 SPACE.K1@138.681,42.673 ; U1.13 176.641,43.219 173.739,40.317 140.095,40.317 138.681,41.73 SPACE.K1@138.681,42.673
L_SHIFT_L1: L_SHIFT.L1
L_SHIFT_L2: L_SHIFT.L2
L_SHIFT_L3: L_SHIFT.L3
L_SHIFT_L4: L_SHIFT.L4
L_SHIFT_P1: L_SHIFT.P1
L_SHIFT_P2: L_SHIFT.P2
LEFT_L1: LEFT.L1
LEFT_L2: LEFT.L2
LEFT_L3: LEFT.L3
LEFT_L4: LEFT.L4
LEFT_P1: LEFT.P1
LEFT_P2: LEFT.P2
M_L1: M.L1
M_L2: M.L2
M_L3: M.L3
M_L4: M.L4
M_P1: M.P1
M_P2: M.P2
N_K2: <.K2 BACKSPACE.K2 E.K2 F2.K2 N.K2 U1.17 W.K2 | length 386.2
  Top Layer w0.15: v1@124.339,78.235 177.036,78.235 v1(178.181,77.09) ; v1(178.054,64.771) 182.931,64.771 v1(183.477,64.225) ; v1(182.665,58.801) 192.189,58.801 v1(192.261,58.729) v1(209.734,58.729) ; v1(240.516,93.453) v1(306.23,93.453)
  Bottom Layer w0.15: F2.K2 93.168,132.297 102.287,123.177 102.287,122.87 107.019,118.139 107.019,109.797 110.565,106.251 110.565,104.327 108.601,102.363 107.274,102.363 ; W.K2 103.703,102.363 107.274,102.363 ; 119.949,98.045 119.949,94.872 122.682,94.87 122.682,89.028 121.458,87.872 121.458,84.964 121.288,84.794 121.288,81.286 v1@124.339,78.235 ; E.K2 120.478,102.363 120.478,98.574 119.948,98.044 107.659,98.044 107.274,98.43 107.274,102.363 ; U1.17 172.891,44.595 172.891,46.999 182.296,56.404 182.296,56.651 182.665,57.021 v1(182.665,58.801) ; v1(178.054,64.771) 178.054,76.201 178.181,76.328 v1(178.181,77.09) ; v1(182.665,58.801) 182.896,58.802 185.151,61.055 185.151,62.551 v1(183.477,64.225) ; v1(192.261,58.729) 192.261,61.97 193.117,62.826 N.K2 ; v1(209.734,58.729) 214.502,63.496 222.128,63.496 223.162,62.462 228.436,62.462 229.952,63.979 229.952,64.263 <.K2 232.227,64.263 232.227,74.598 239.057,81.428 239.057,84.65 239.817,85.41 239.817,92.755 v1(240.516,93.453) ; v1@306.23,93.453 311.232,98.451 311.232,103.287 311.958,104.014 311.958,106.922 313.309,108.078 313.309,113.539 311.366,115.721 311.366,119.226 312.116,119.975 BACKSPACE.K2
  other v1: 124.339,78.236
N_L1: N.L1
N_L2: N.L2
N_L3: N.L3
N_L4: N.L4
N_P1: N.P1
N_P2: N.P2
O_L1: O.L1
O_L2: O.L2
O_L3: O.L3
O_L4: O.L4
O_P1: O.P1
O_P2: O.P2
P_K1: F5.K1 L_ALT.K1 P.K1 R_ALT.K1 U1.12 | length 329.6
  Top Layer w0.15: v1(69.555,41.377) 70.069,40.863 v1(140.229,40.863) v1(175.584,40.863) 206.96,40.863 v1(207.521,41.424)
  Bottom Layer w0.15: L_ALT.K1 69.133,42.673 69.133,41.799 v1(69.555,41.377) ; F5.K1 137.084,136.613 136.64,136.168 136.64,123.348 138.557,121.428 138.557,115.258 137.122,113.823 137.122,104.623 134.874,102.376 134.874,85.218 134.874,83.186 133.858,82.043 133.858,78.741 135.235,77.969 135.235,67.212 134.653,66.63 134.653,61.984 138.077,58.561 138.077,47.867 140.671,45.274 140.671,41.304 v1@140.229,40.862 ; v1(175.584,40.863) 177.641,42.921 U1.12 ; v1(207.521,41.424) 208.77,42.673 209.734,42.673 R_ALT.K1 212.008,42.673 212.008,42.957 213.897,44.846 217.065,44.846 219.977,47.758 219.977,48.756 230.712,59.492 237.33,59.492 238.354,60.516 238.354,62.89 239.764,64.3 239.764,78.921 242.071,81.228 242.071,98.174 241.859,98.386 P.K1
P_L1: P.L1
P_L2: P.L2
P_L3: P.L3
P_L4: P.L4
P_P1: P.P1
P_P2: P.P2
Q_K1: 6.K1 [.K1 BACKSPACE.K1 ENTER.K1 F6.K1 F10.K1 O.K1 Q.K1 S.K1 U1.3 V.K1 | length 493.8
  Top Layer w0.15: v1(95.377,88.647) 106.19,88.647 110.762,93.219 v1(141.732,93.219) ; v1(153.51,53.164) v1(182.385,53.164) 183.536,53.164 v1(184.154,52.546) ; v1(224.679,97.953) v1(259.965,97.953)
  Bottom Layer w0.15: 69.514,101.707 69.514,101.423 73.279,97.537 76.2,97.537 84.709,92.33 84.709,90.425 89.662,84.837 91.547,82.952 91.694,82.952 ; Q.K1 71.546,99.823 ; S.K1 93.59,80.773 93.021,80.773 93.021,81.626 91.694,82.952 ; v1(95.377,88.647) 91.694,84.964 91.694,82.952 ; v1(141.732,93.219) 141.732,92.33 ; V.K1 142.92,61.723 142.92,62.501 143.937,63.517 ; v1(153.51,53.164) 153.51,55.81 145.803,63.517 143.937,63.517 ; F6.K1 157.271,137.923 157.271,135.413 158.321,134.363 158.321,121.06 157.271,120.01 157.271,118.873 6.K1 154.679,118.873 139.474,103.668 139.474,92.373 141.732,92.33 ; v1@182.385,53.163 182.385,54.088 187.996,59.698 187.996,64.989 189.309,66.302 191.539,66.302 198.857,73.623 198.857,80.275 201.115,82.533 201.115,84.54 203.785,87.209 211.016,87.209 212.217,88.52 217.805,88.52 217.805,93.854 222.192,98.385 222.809,98.385 O.K1 ; v1(184.154,52.546) 184.154,43.328 184.526,42.956 186.379,42.956 186.641,43.219 U1.3 ; 222.809,101.26 O.K1 ; 222.809,101.261 221.902,102.167 221.902,106.61 212.146,116.366 212.146,120.288 218.313,126.239 222.631,126.239 222.631,131.319 228.712,137.923 F10.K1 ; v1(224.679,97.953) 223.946,98.686 223.946,99.823 223.378,99.823 O.K1 ; v1(259.965,97.953) 260.397,98.386 260.909,98.386 [.K1 261.478,99.823 262.046,99.823 262.046,99.618 263.649,98.015 281.28,98.015 ; ENTER.K1 295.458,80.773 295.458,83.836 281.28,98.015 ; BACKSPACE.K1 295.451,118.873 289.433,112.142 289.433,107.316 285.143,107.263 281.28,103.399 281.28,98.014 ; 141.732,92.33 141.605,88.774 140.434,87.731 140.434,84.665 138.557,82.805 138.557,77.979 139.065,77.471 139.065,77.399 140.165,77.399 140.165,72.553 143.937,68.781 143.937,63.517
Q_L1: Q.L1
Q_L2: Q.L2
Q_L3: Q.L3
Q_L4: Q.L4
Q_P1: Q.P1
Q_P2: Q.P2
R_ALT_L1: R_ALT.L1
R_ALT_L2: R_ALT.L2
R_ALT_L3: R_ALT.L3
R_ALT_L4: R_ALT.L4
R_ALT_P1: R_ALT.P1
R_ALT_P2: R_ALT.P2
R_CTRL_K1: C.K1 F3.K1 L_CTRL.K1 R_CTRL.K1 U1.11 | length 314.4
  Bottom Layer w0.15: L_CTRL.K1 45.384,42.673 45.384,42.389 46.841,40.932 107.23,40.932 122.996,56.698 ; F3.K1 99.06,136.399 108.585,129.795 108.634,124.143 110.589,122.188 110.589,119.973 114.636,115.926 115.286,115.926 122.096,109.119 122.096,108.972 128.743,102.325 128.743,74.588 132.207,74.55 132.207,69.47 128.016,69.47 123.871,65.279 123.871,61.723 C.K1 122.733,60.286 122.996,60.023 122.996,56.698 ; U1.11 178.641,43.219 ; R_CTRL.K1 233.61,42.673 231.921,40.984 180.876,40.984 178.641,43.219 ; 122.996,56.698 139.641,40.054 175.476,40.054 178.641,43.219
R_CTRL_L1: R_CTRL.L1
R_CTRL_L2: R_CTRL.L2
R_CTRL_L3: R_CTRL.L3
R_CTRL_L4: R_CTRL.L4
R_CTRL_P1: R_CTRL.P1
R_CTRL_P2: R_CTRL.P2
R_K2: 7.K2 (A).K2 ;.K2 >.K2 [.K2 CAPS.K2 F3.K2 F.K2 I.K2 P.K2 R.K2 U1.15 Z.K2 | length 458.5
  Top Layer w0.15: v1(100.642,77.683) v1(140.499,77.683) ; v1(119.253,112.904) 140.716,112.904 v1(141.605,112.015) ; v1(143.256,109.602) 143.395,109.602 v1(144.713,108.284) v1@144.713,108.451 ; v1@144.712,108.451 145.72,107.443 v1(183.515,107.443) ; v1(218.194,103.452) 227.085,103.452 229.943,100.594 233.557,100.594 234.552,101.589 249.12,101.589 v1(249.832,100.877)
  Bottom Layer w0.15: CAPS.K2 82.545,83.313 84.338,85.106 85.696,85.106 87.204,83.597 87.204,83.313 88.342,83.313 89.479,83.313 89.479,82.853 97.424,74.908 97.867,74.908 ; Z.K2 97.867,74.908 ; v1(100.642,77.683) 97.867,74.908 ; F3.K2 112.218,124.683 110.953,123.418 110.953,119.981 114.746,116.189 115.968,116.189 v1(119.253,112.904) ; v1(140.499,77.683) 145.365,82.549 F.K2 ; R.K2 141.234,102.363 141.803,102.363 ; v1(141.605,112.015) 141.605,111.253 v1(143.256,109.602) ; v1(144.713,108.284) 141.803,105.374 141.803,102.363 ; U1.15 174.641,43.219 173.227,41.805 164.534,41.805 163.129,43.21 163.129,49.51 153.444,59.195 153.444,66.267 154.095,66.918 154.095,75.166 152.573,76.688 152.573,82.136 151.396,83.313 F.K2 ; v1(183.515,107.443) 183.515,116.638 187.154,120.276 187.154,121.413 7.K2 197.625,121.413 206.756,112.396 212.979,112.396 212.913,105.891 215.728,103.077 215.728,102.363 ; 215.728,102.363 I.K2 218.003,102.363 218.003,103.261 v1(218.194,103.452) ; v1(249.832,100.877) 250.097,100.612 253.417,100.612 P.K2@255.168,102.363 ; >.K2 250.14,74.229 259.223,83.313 259.507,83.313 ; P.K2 P.K2@255.168,102.363 ; 259.792,83.313 259.507,83.313 ; [.K2 272.878,102.363 272.878,102.079 271.375,100.575 266.884,100.575 265.907,101.553 259.507,101.553 ; 141.803,102.363 141.803,100.977 145.365,97.415 F.K2 ; P.K2@255.168,102.363 255.37,102.363 255.534,102.363 256.103,102.363 258.697,102.363 259.507,101.553 ; 259.507,83.313 259.507,101.553
R_L1: R.L1
R_L2: R.L2
R_L3: R.L3
R_L4: R.L4
R_P1: R.P1
R_P2: R.P2
RIGHT_L1: RIGHT.L1
RIGHT_L2: RIGHT.L2
RIGHT_L3: RIGHT.L3
RIGHT_L4: RIGHT.L4
RIGHT_P1: RIGHT.P1
RIGHT_P2: RIGHT.P2
S$524: 
S$528: 
S$530: 
S$532: 
S$1954: 
S_K2: 4.K2 DELETE.K2 H.K2 J.K2 K.K2 L_ALT.K2 S.K2 U1.21 | length 427.3
  Top Layer w0.15: v1@107.178,85.924 113.665,92.584 129.159,92.584 v1(129.221,89.279) 129.472,89.028 134.747,92.33 141.732,92.33 141.732,89.155 153.162,89.155 153.924,88.52 161.544,88.52 162.306,89.282 171.913,89.262 172.847,88.266 177.534,88.253 180.602,85.185 v1(183.212,85.184) ; v1(183.212,85.184) 184.731,83.665 194.609,83.665 197.368,80.906 v1(200.108,80.906) ; v1(234.549,116.942) 250.373,116.942 254.501,121.07 257.866,121.07 260.132,123.336 262.459,123.336 271.145,131.7 284.607,131.7 284.638,128.804 296.807,128.804 296.799,132.208 314.198,132.081 v1@314.127,128.804
  Bottom Layer w0.15: L_ALT.K2 93.565,45.213 100.082,51.729 100.082,75.758 106.127,81.804 106.127,83.313 S.K2 107.265,85.839 v1(107.179,85.924) ; v1(129.221,89.279) 129.159,102.363 130.175,103.379 130.048,112.396 131.865,113.938 131.865,119.251 131.141,119.975 4.K2 ; U1.21 168.641,45.473 170.056,45.473 170.154,45.375 170.154,43.219 ; 170.155,43.219 171.019,43.219 171.129,43.328 171.129,45.609 181.563,56.043 181.563,62.284 182.548,63.269 182.548,80.959 183.465,81.876 H.K2 183.465,84.931 v1(183.212,85.184) ; v1(200.108,80.906) 201.377,82.176 201.377,83.313 J.K2 212.445,83.313 214.135,81.622 219.021,81.622 220.427,83.029 220.427,83.313 K.K2@221.023,83.313 ; K.K2 K.K2@221.023,83.313 ; v1(234.549,116.942) 232.189,114.583 232.189,104.919 229.75,102.479 229.75,100.872 221.023,92.145 K.K2@221.023,83.313 ; v1(314.127,128.805) 321.641,136.32 DELETE.K2
S_L1: S.L1
S_L2: S.L2
S_L3: S.L3
S_L4: S.L4
S_P1: S.P1
S_P2: S.P2
SPACE_L1: SPACE.L1
SPACE_L2: SPACE.L2
SPACE_L3: SPACE.L3
SPACE_L4: SPACE.L4
SPACE_P1: SPACE.P1
SPACE_P2: SPACE.P2
T_L1: T.L1
T_L2: T.L2
T_L3: T.L3
T_L4: T.L4
T_P1: T.P1
T_P2: T.P2
TAB_L1: TAB.L1
TAB_L2: TAB.L2
TAB_L3: TAB.L3
TAB_L4: TAB.L4
TAB_P1: TAB.P1
TAB_P2: TAB.P2
U1_24: F1_LED.2 U1.24 | length 123.4
  Top Layer w0.15: v1(185.918,60.114) 186.104,59.928 275.661,59.928 276.438,60.705 276.438,61.342 F1_LED.2
  Bottom Layer w0.15: U1.24 165.641,43.219 166.169,42.692 172.523,42.692 173.154,43.322 173.154,46.891 185.918,59.655 v1(185.918,60.114)
U1_25: F2_LED.2 U1.25 | length 134.1
  Top Layer w0.15: v1(165.714,55.491) 273.051,55.491 279.762,62.203 279.762,64.372 277.713,66.422 F2_LED.2
  Bottom Layer w0.15: U1.25 164.641,54.419 v1(165.714,55.491)
U1_26: F3_LED.2 U1.26 | length 142.5
  Top Layer w0.15: v1(189.509,72.189) 189.51,73.788 274.47,73.788 276.439,71.819 276.439,71.502 F3_LED.2
  Bottom Layer w0.15: U1.26 163.641,43.2 164.774,42.068 172.934,42.068 174.129,43.262 174.129,47.494 186.357,59.722 186.357,62.069 183.741,64.686 183.741,67.769 185.192,69.386 188.886,69.386 189.484,69.978 v1(189.509,72.189)
U1_27: F1_LED.1 F2_LED.1 F3_LED.1 U1.27 | length 175.2
  Top Layer w0.15: v1(152.654,75.185) 177.038,75.185 177.038,75.82 v1@272.763,75.82 ; v1(272.796,71.502) F3_LED.1 F2_LED.1 F1_LED.1
  Bottom Layer w0.15: v1(152.654,75.185) 150.889,73.419 150.889,66.544 149.778,65.433 149.778,62.116 162.641,49.252 U1.27 ; v1(272.796,71.502) v1(272.796,75.82)
U_K2: "'(\").K2" ].K2 D.K2 ENTER.K2 L.K2 L_CTRL.K2 U1.19 U.K2 | length 378.1
  Top Layer w0.15: v1(64,51.623) 81.847,69.47 126.571,69.47 126.571,70.582 ; v1(125.095,73.407) 125.095,72.058 126.57,70.583 ; v1(180.609,63.955) 179.21,62.556 166.917,62.556 165.898,63.575 155.291,63.575 148.844,69.216 126.492,69.216 126.571,70.582 ; v1(209.251,88.778) 209.251,88.52 v1(241.427,88.52) 241.554,88.393 v1(272.161,88.393)
  Bottom Layer w0.15: L_CTRL.K2 58.491,45.213 64,50.722 v1(64,51.623) ; v1(125.095,73.407) 126.442,74.753 D.K2 ; U1.19 170.641,45.473 170.641,45.493 181.3,56.152 181.3,63.54 180.885,63.955 ; v1(180.609,63.955) 180.885,63.955 ; U.K2 197.816,100.214 ; v1(209.251,88.778) 197.816,100.214 ; L.K2 240.742,87.834 v1(241.427,88.52) ; v1(272.161,88.393) 275.209,85.345 277.495,85.345 277.495,83.313 277.577,83.313 ; 277.577,83.313 278.715,83.313 279.852,83.313 283.836,79.329 297.63,79.329 297.917,79.616 297.917,81.577 299.781,83.44 299.781,88.046 ; ].K2 294.204,102.363 299.317,97.249 299.317,88.51 299.781,88.046 ; ENTER.K2 308.565,83.313 308.565,83.459 303.977,88.046 299.781,88.046 ; 180.885,63.955 182.285,65.355 182.285,84.874 187.735,90.325 187.735,90.455 197.494,100.214 197.816,100.214
U_L1: U.L1
U_L2: U.L2
U_L3: U.L3
U_L4: U.L4
U_P1: U.P1
U_P2: U.P2
UP_L1: UP.L1
UP_L2: UP.L2
UP_L3: UP.L3
UP_L4: UP.L4
UP_P1: UP.P1
UP_P2: UP.P2
V_L1: V.L1
V_L2: V.L2
V_L3: V.L3
V_L4: V.L4
V_P1: V.P1
V_P2: V.P2
W_L1: W.L1
W_L2: W.L2
W_L3: W.L3
W_L4: W.L4
W_P1: W.P1
W_P2: W.P2
X_K1: ?.K1 F1.K1 F2.K1 F8.K1 H.K1 L.K1 M.K1 R.K1 U1.5 X.K1 | length 449.9
  Top Layer w0.15: v1(120.65,75.855) v1(127.613,75.855) 127.704,75.947 138.075,75.947 138.049,69.597 158.877,69.597 160.274,69.597 170.307,69.47 171.196,69.47 v1(171.759,69.771) ; v1(171.759,69.771) 172.144,69.386 v1(195.852,69.386) ; v1(230.967,65.878) 232.74,64.106 244.13,64.106 247.168,61.069 v1(254.77,61.069)
  Bottom Layer w0.15: F1.K1 62.021,137.923 62.021,138.207 64.476,140.662 68.153,140.662 69.642,142.151 74.853,142.151 78.924,138.08 78.924,137.796 F2.K1@79.493,137.796 ; F2.K1 F2.K1@79.493,137.796 ; X.K1 104.82,61.723 104.82,61.547 106.422,59.945 114.946,59.945 118.744,63.744 118.744,69.709 118.744,82.652 116.582,84.814 116.582,85.852 101.42,101.014 101.42,103.888 104.759,107.226 104.759,118.974 101.169,122.563 99.244,122.563 91.05,130.758 86.531,130.758 F2.K1@79.493,137.796 ; 118.744,75.855 v1(120.65,75.855) ; R.K1 127.559,98.386 127.613,98.332 v1(127.613,75.855) ; H.K1 171.495,80.773 ; v1(171.759,69.771) 173.075,71.087 173.075,72.403 171.495,73.983 171.495,80.773 ; U1.5 184.641,48.712 197.779,61.85 ; F8.K1 183.306,137.923 174.044,128.661 174.044,111.73 174.807,110.966 174.807,105.039 173.089,103.321 173.089,85.756 171.495,84.162 171.495,80.773 ; v1(195.852,69.386) 197.779,67.459 197.779,61.85 ; v1(230.967,65.878) 230.967,77.441 228.772,79.636 228.772,80.773 L.K1 227.296,80.773 226.498,80.773 220.52,74.794 220.52,70.405 210.253,60.138 201.498,60.138 200.07,61.566 200.07,61.85 199.502,61.85 M.K1 197.796,61.85 197.779,61.85 ; v1(254.77,61.069) 254.946,61.245 254.946,61.723 ?.K1
X_L1: X.L1
X_L2: X.L2
X_L3: X.L3
X_L4: X.L4
X_P1: X.P1
X_P2: X.P2
Y_K2: ?.K2 \.K2 F12.K2 LEFT.K2 R_CTRL.K2 U1.18 V.K2 Y.K2 | length 352.2
  Top Layer w0.15: v1(172.454,45.687) 173.335,44.806 v1(217.929,44.806)
  Bottom Layer w0.15: V.K2 156.027,64.263 156.027,63.979 160.136,59.87 166.154,59.87 ; v1(172.454,45.687) 172.24,45.473 171.641,45.473 U1.18 171.641,43.219 171.377,42.955 166.487,42.955 166.154,43.287 166.154,59.87 ; Y.K2 178.766,100.926 179.5,100.191 179.5,85.643 176.172,82.314 176.172,69.256 172.432,65.517 172.432,63.576 168.726,59.87 166.154,59.87 ; v1(217.929,44.806) 219.248,43.487 224.802,43.487 225.676,44.361 238.89,44.361 239.777,43.475 245.263,43.475 246.716,44.929 246.716,45.213 R_CTRL.K2 249.33,45.213 268.052,63.935 268.052,64.263 ?.K2 270.327,64.263 271.079,63.511 278.842,63.511 ; LEFT.K2 278.842,63.511 ; F12.K2 284.678,140.463 284.678,140.179 288.638,136.219 298.971,136.219 308.356,129.922 308.356,128.271 316.373,120.286 \.K2@316.373,102.363 ; \.K2 \.K2@316.373,102.363 ; 278.842,63.511 291.514,63.511 292.723,62.304 298.374,62.304 303.904,67.835 303.904,70.497 315.804,82.397 315.804,102.363 \.K2@316.373,102.363
Y_L1: Y.L1
Y_L2: Y.L2
Y_L3: Y.L3
Y_L4: Y.L4
Y_P1: Y.P1
Y_P2: Y.P2
Z_L1: Z.L1
Z_L2: Z.L2
Z_L3: Z.L3
Z_L4: Z.L4
Z_P1: Z.P1
Z_P2: Z.P2
pads on no net: 0. 1. 2. 3. 4. 5. 6. 7. 8. 9. "'(\")." (A). -. ;. <. =. >. ?. [. \. ]. `(GRAVE_ACCENT). B. BACKSPACE. C. CAPS. D. DELETE. DOWN. E. ENTER. ESC. F1. F2. F3. F4. F5. F6. F7. F8. F9. F10. F11. F12. F. FN. G. H. HOME. I. J. K. L. L_ALT. L_CTRL. L_SHIFT. LEFT. M. N. O. P. Q. R. R_ALT. R_CTRL. RIGHT. S. SPACE. T. TAB. U1.98 U1.99 U. UP. V. W. X. Y. Z.

## Silkscreen, mask and mechanical layers (free items; w line width, h text height)
Top Overlay:
  drawing of 491 lines, arcs and shapes, not listed
Document:
  lines w0.003: 181.077,95.447 181.128,95.498